# Altium PCB rotenc_pcb.PcbDoc
Units mil, origin at the board's own origin, x right, y up, seen from the top; angles counter-clockwise.
Board outline 1422 x 1422 mil, 2 copper layers (Top Layer, Bottom Layer); 11 components, 12 nets, 41 pads, 14 vias.
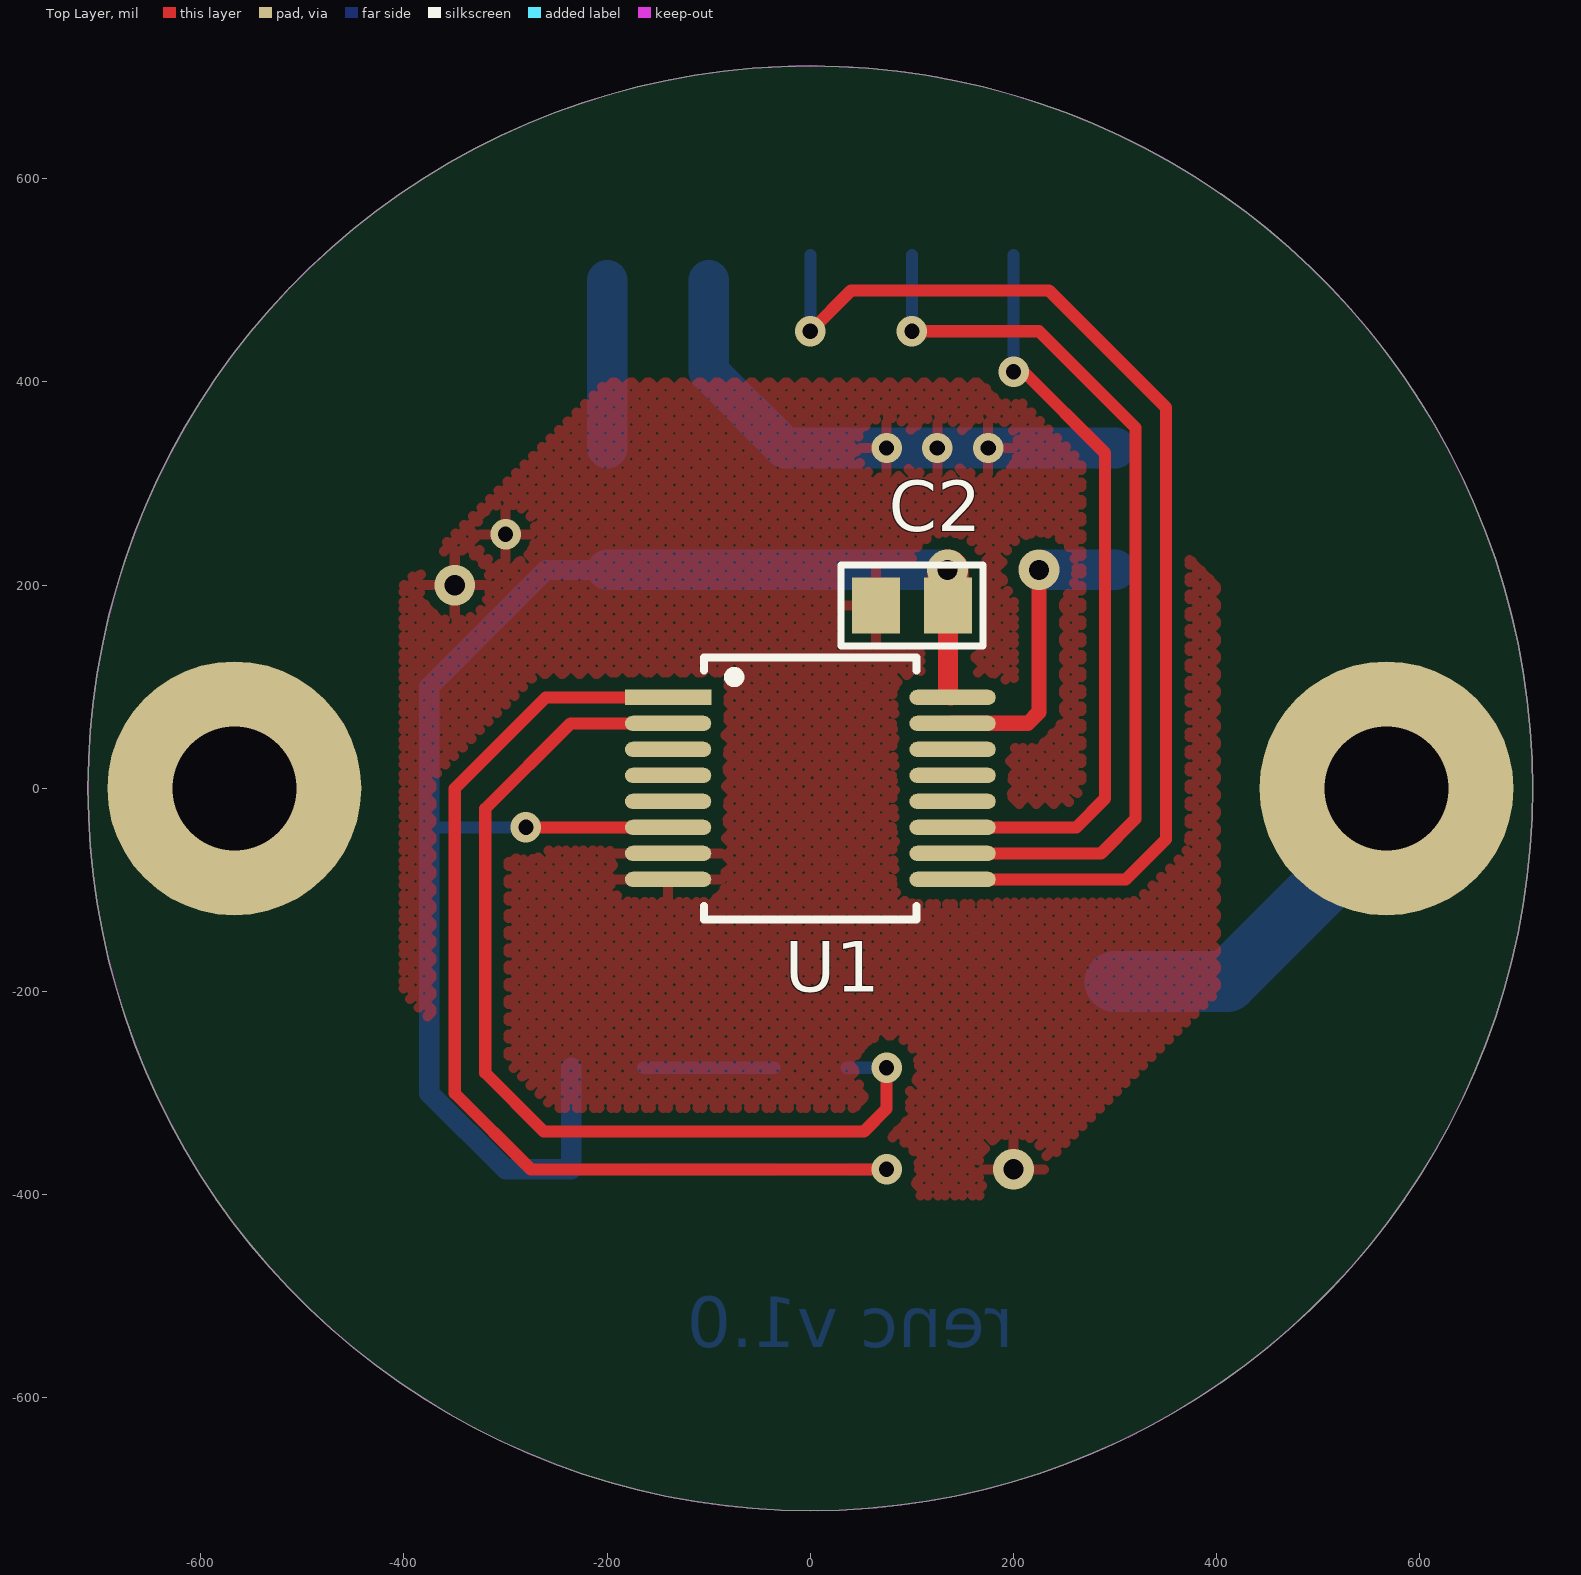
[diagram p0: Top Layer view]
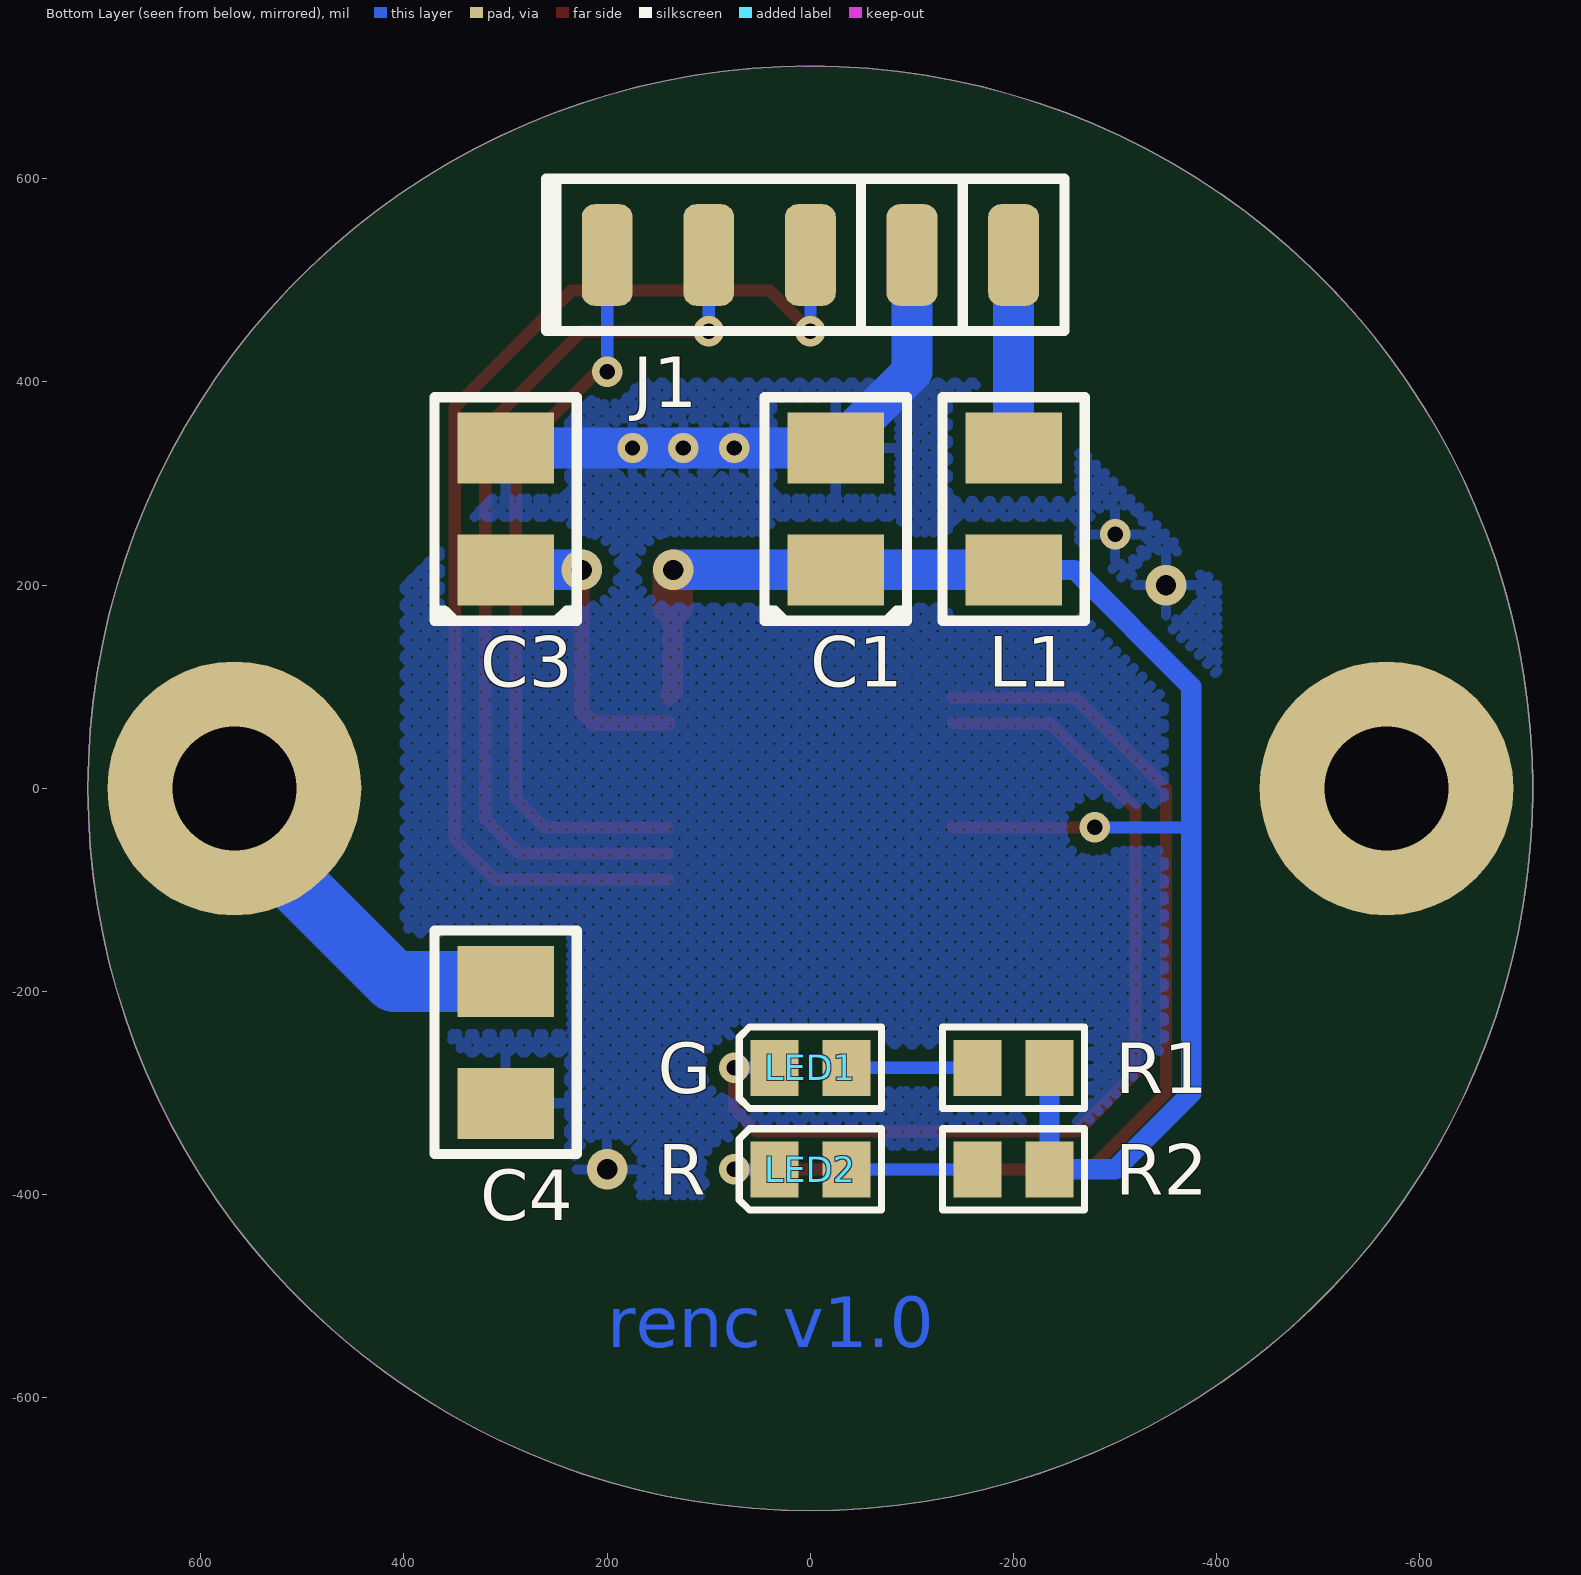
[diagram p1: Bottom Layer view, seen from below]
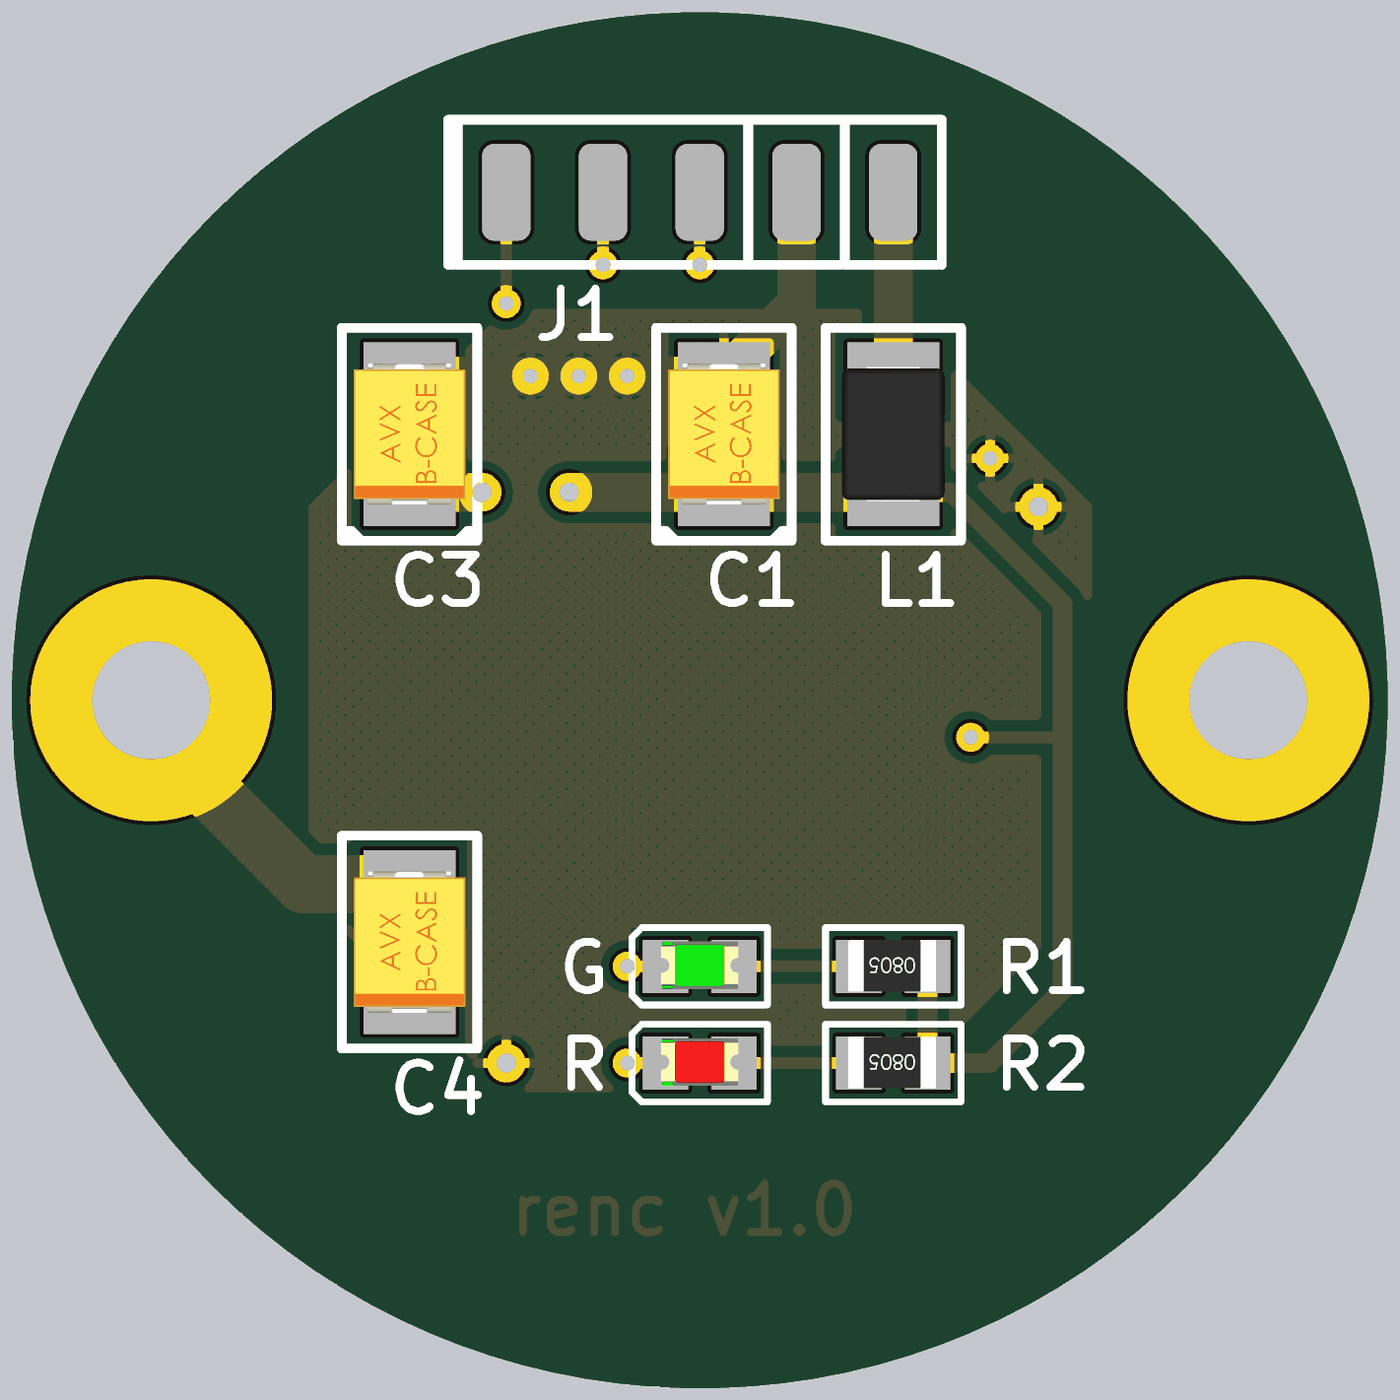
[diagram p2: 3D render of the assembled board from below, using the file's embedded part models]

## Layer stack, top to bottom
Top Layer: signal copper 1.4
Dielectric: dielectric 12.6, FR-4, Dk 4.8
Bottom Layer: signal copper 1.4

## Board outline
0,-711 cw(c0,0) -711,0 cw(c0,0) 0,711 cw(c0,0) 711,0 cw(c0,0)

## Design rules (kind name [scope] priority, off if disabled: settings)
Clearance Clearance_1 [InPolygon] p1: gap=12
Clearance [All] p2: gap=10
HoleSize [All] p1: absolutevalues=TRUE maxlimit=200 minlimit=1 maxpercent=80.000 minpercent=20.000
MinimumSolderMaskSliver [All] p1: minsoldermaskwidth=2
PolygonConnect [All] p1: connectstyle=Relief reliefconductorwidth=10 reliefentries=4 polygonreliefangle="90 Angle" airgapwidth=10
RoomDefinition rotenc [InComponentClass('rotenc')] p1: confinementstyle=ConfineOut formatcopy=TRUE lockcomponents=FALSE outline 900,-750 1400,-750 1400,-250 900,-250
RoutingVias [All] p1: holewidth=28 width=50 viastyle="Through Hole" minholewidth=28 minwidth=50 maxholewidth=28 maxwidth=50
SilkToSilkClearance [All] p1: silktosilkclearance=5
SilkToSolderMaskClearance [IsPad] p1: minsilkscreentomaskgap=3 clearancetoexposedcopper=TRUE
SolderMaskExpansion [All] p1: expansion=4
Width [All] p1: maxlimit=90 minlimit=10 preferedwidth=12 minimp=50.000000 maximp=50.000000 favimp=50.000000
24 further rules are at their usual default settings.

## Components (designator, comment, footprint, x,y, rotation, side; value= is the part's Value field where it differs from the comment)
C1 "10V22uF" CAP1210P -25,275 r90 bottom
C2 "0.1uF" CAP0805 100,180 r0 top
C3 "10V22uF" CAP1210P 300,275 r90 bottom
C4 "0.1uF" CAP1210 300,-250 r90 bottom
J1 "Header 5" J5 200,525 r180 bottom
L1 "220uH" IND1210 -200,275 r90 bottom
LED1 "G" LED2G 0,-275 r0 bottom
LED2 "R" LED2R 0,-375 r0 bottom
R1 "4.7K" RES0805 -200,-275 r0 bottom
R2 "4.7K" RES0805 -200,-375 r0 bottom
U1 "AS5045" SSOP16 0,0 r0 top

## Footprints (in the part's own frame and the unit in brackets; to place one, negate y for a bottom-side part, rotate by r counter-clockwise, add the part's x,y. Pads: shape width x height; smd on the part's side, far side on the other; paste and mask are expansions set on the pad)
CAP0805 [mm]
  rect 1.2x1.4 smd: 1(-0.9,0) 2(0.9,0)
  silkscreen extent -1.78,-1.02 1.78,1.02, body extent -1,-0.62 1,0.63, height 0.78
CAP1210 [mil]
  rect 70x95 smd: 1(-60,0) 2(60,0)
  silkscreen extent -110,-70 110,70, body extent -73,-58 73,58, height 80
CAP1210P [mil]
  rect 70x95 smd: 1(-60,0) 2(60,0)
  silkscreen extent -110,-70 110,70, body extent -73,-58 73,58, height 80
IND1210 [mil]
  rect 70x95 smd: 1(-60,0) 2(60,0)
  silkscreen extent -110,-70 110,70, body extent -70,-53 70,53, height 94
J5 [mil]
  rrect50% 50x100 smd: 1(0,0) 2(100,0) 3(200,0) 4(300,0) 5(400,0)
  silkscreen extent -60,-75 450,75
LED2G [mm]
  rect 1.2x1.4 smd: 1(-0.9,0) 2(0.9,0)
  silkscreen extent -1.78,-1.02 1.78,1.02, body extent -1.01,-0.65 1.01,0.6, height 1.1
LED2R [mm]
  rect 1.2x1.4 smd: 1(-0.9,0) 2(0.9,0)
  silkscreen extent -1.78,-1.02 1.78,1.02, body extent -1.01,-0.65 1.01,0.6, height 1.1
RES0805 [mm]
  rect 1.2x1.4 smd: 1(-0.9,0) 2(0.9,0)
  silkscreen extent -1.78,-1.02 1.78,1.02, body extent -1.12,-0.69 1.18,0.66, height 0.76
SSOP16 [mil]
  rect 85x15 smd: 1(-140,89.57)
  oval 85x15 smd: 2(-140,63.98) 3(-140,38.39) 4(-140,12.8) 5(-140,-12.8) 6(-140,-38.39) 7(-140,-63.98) 8(-140,-89.57) 9(140,-89.57) 10(140,-63.98) 11(140,-38.39) 12(140,-12.8) 13(140,12.8) 14(140,38.39) 15(140,63.98) 16(140,89.57)
  silkscreen extent -105,-129 105,129, body extent -153,-126 155,126, height 85

## Part data
C1 C3: library part "Cap Pol2", "Polarized Capacitor (Axial)"
C2 C4: library part Cap, "Capacitor"
J1: "Header, 5-Pin"
L1: library part Inductor, "Inductor"
LED1 LED2: library part LED, "LED"
R1 R2: library part Res1, "Resistor"
U1: "Magnetic Rotary Encoder"

## Free pads (board coordinates)
  round 250 hole 122: 0(-567,0) 0(567,0)

## Via types
v1: diameter 30, hole 15, Top Layer to Bottom Layer, 10 vias
v2: diameter 40, hole 20, Top Layer to Bottom Layer, 4 vias

## Nets (pads, with @x,y where several pads share a name; then routed paths per layer and width w, separated by ;. In a path a pad name is that pad's centre, name@x,y a point inside that pad or via, vN(x,y) a via of type N, cw(c..) or ccw(c..) an arc to the next point about the centre after c; other vN are vias at no path point)
GND: C1.2 C2.1 C3.2 C4.1 J1.4 U1.7 U1.8 | length 521.1
  Bottom Layer w40: J1.4@-100,500 -100,410 C1.2 C3.2
  other v1: -300,250 75,335 125,335 175,335
  other v2: 200,-375 -350,200
NetJ1_1: J1.1 U1.11 | length 739.9
  Top Layer w12: U1.11 261.61,-38.39 290,-10 290,330 210,410 v1(200,410)
  Bottom Layer w12: v1(200,410) J1.1
NetJ1_2: J1.2 U1.10 | length 913.4
  Top Layer w12: v1(100,450) 225,450 320,355 320,-30 286.02,-63.98 U1.10
  Bottom Layer w12: v1(100,450) J1.2
NetJ1_3: J1.3 U1.9 | length 1140.6
  Top Layer w12: v1(0,450) 40,490 235,490 350,375 350,-50 310.43,-89.57 U1.9
  Bottom Layer w12: v1(0,450) J1.3
NetJ1_5: J1.5 L1.2 | length 165
  Bottom Layer w40: L1.2 J1.5@-200,500
NetLED1_1: LED1.1 R1.2 | length 129.1
  Bottom Layer w12: R1.2 LED1.1
NetLED1_2: LED1.2 U1.2 | length 982.8
  Top Layer w12: U1.2 -236.02,63.98 -320,-20 -320,-280 -262.35,-337.65 52.67,-337.65 75,-315.32 v1(75,-275)
  Bottom Layer w12: LED1.2 v1(75,-275)
NetLED2_1: LED2.1 R2.2 | length 129.1
  Bottom Layer w12: R2.2 LED2.1
NetLED2_2: LED2.2 U1.1 | length 1042.7
  Top Layer w12: U1.1 -260.43,89.57 -350,0 -350,-300 -275,-375 v1(75,-375)
  Bottom Layer w12: LED2.2 v1(75,-375)
NULL: C4.2 pad.0@567,0 | length 332
  Bottom Layer w60: C4.2 410,-190 pad.0@567,-33
V33: C3.1 U1.15 | length 304.6
  Top Layer w15: U1.15 213.98,63.98 225,75 v2(225,215)
  Bottom Layer w40: v2(225,215) C3.1
VCC: C1.1 C2.2 L1.1 R1.1 R2.1 U1.6 U1.16 | length 1588.6
  Top Layer w12: v1(-280,-38.39) U1.6
  Top Layer w20: C2.2 135.43,94.13 U1.16@138.09,91.48
  Top Layer w40: C2.2 v2@135.43,215
  Bottom Layer w12: -375,-40 -373.39,-38.39 v1(-280,-38.39)
  Bottom Layer w20: R1.1 R2.1 -300,-375 -375,-300 -375,-40 -375,100 -260,215 L1.1
  Bottom Layer w40: L1.1 C1.1 v2(135,215)
pads on no net: U1.3 U1.4 U1.5 U1.12 U1.13 U1.14

## Polygon pours and split planes (outlines as drawn)
GND on Top Layer "T_GND_Poly" (hatched 45Degree grid 12 track 10, remove dead copper, pour order 2): -400.61,199.39 -200.61,399.39 199.39,399.39 399.39,199.39 399.39,-200.61 199.39,-400.61 -200.61,-400.61 -400.61,-200.61
GND on Bottom Layer "B_GND_Poly" (hatched 45Degree grid 12 track 10, remove dead copper, pour order 2): -400.61,199.39 -200.61,399.39 199.39,399.39 399.39,199.39 399.39,-200.61 199.39,-400.61 -200.61,-400.61 -400.61,-200.61

## Keep-outs
Keep-Out Layer:
  circle w1: c0,0 r711

## Other copper
Bottom Layer:
  text "renc v1.0" at 200,-550 h50